# Altium PCB Left_Board.PcbDoc (part 1 of 2)
Units mm, origin at the board's own origin, x right, y up, seen from the top; angles counter-clockwise.
Board outline 34.7 x 82.01 mm, 6 copper layers (Top Layer, Layer 2, Layer 3, Layer 4, Layer 5, Bottom Layer), stack 1.538 mm thick; 59 components, 53 nets, 244 pads, 250 vias.
Unrouted connection lines stored in the file: 175.
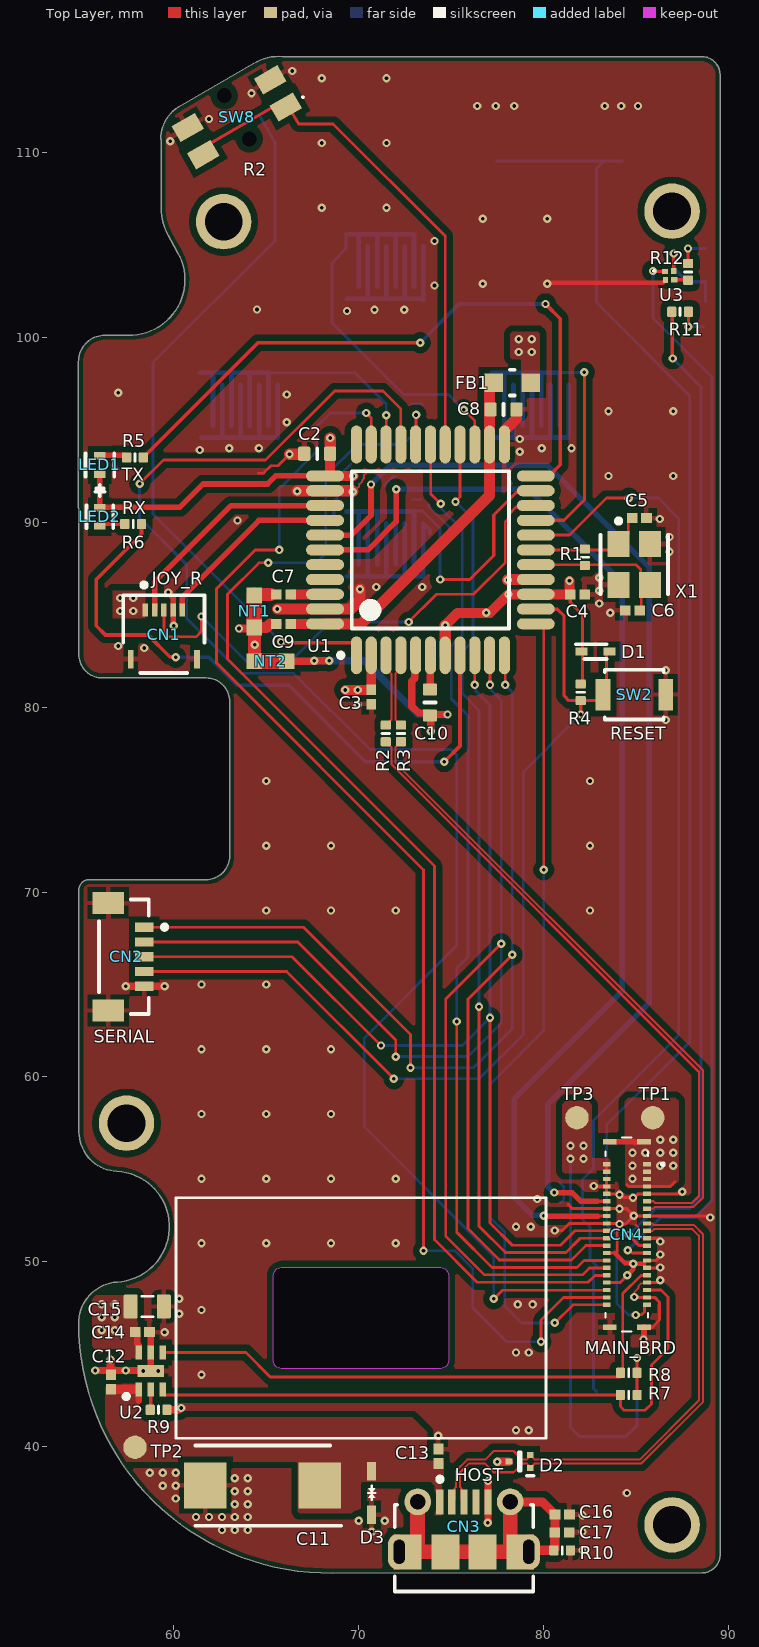
[diagram p0: Top Layer view]
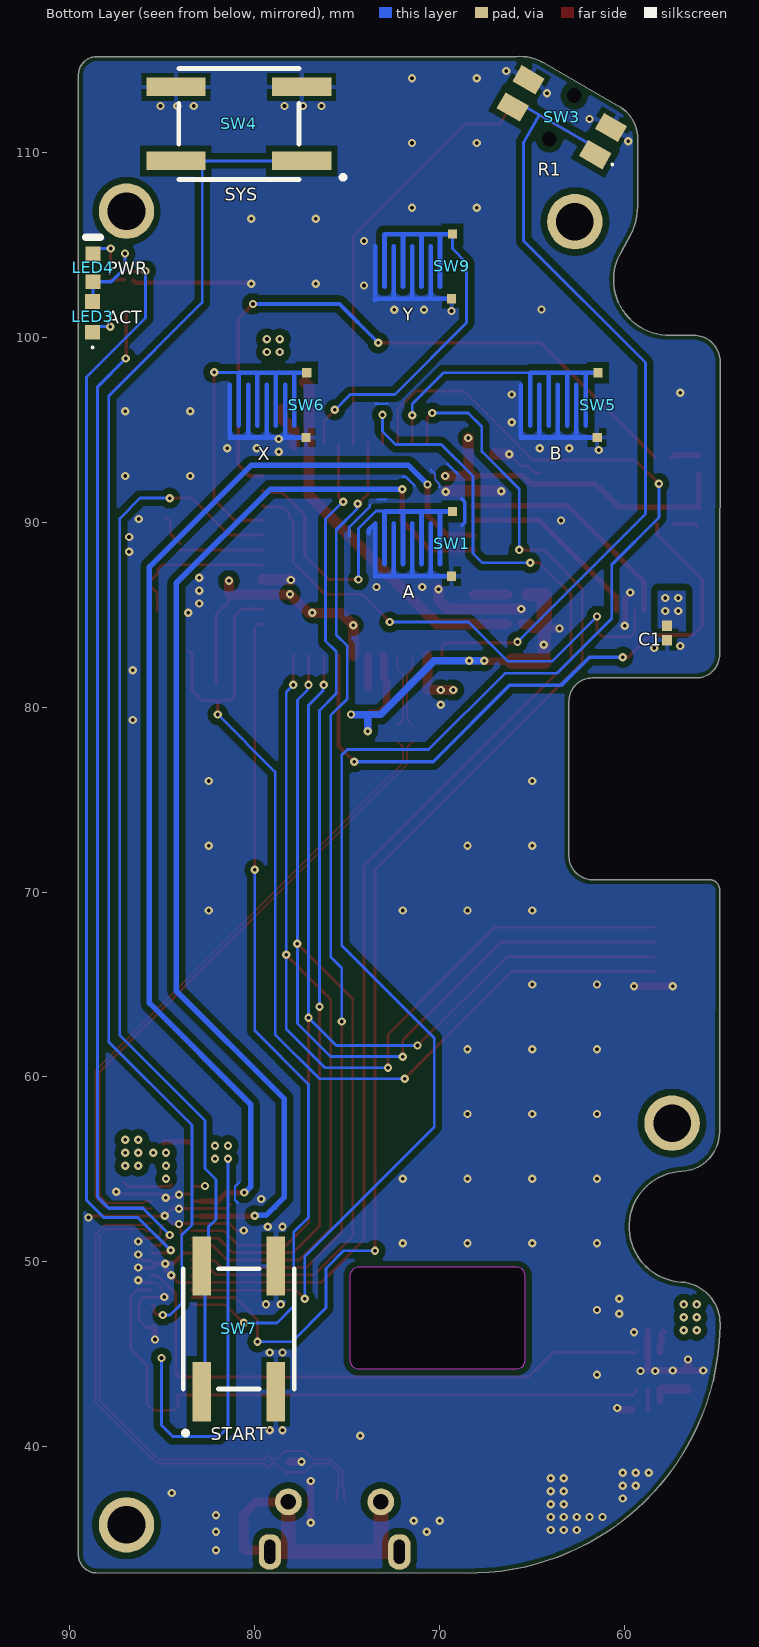
[diagram p1: Bottom Layer view, seen from below]
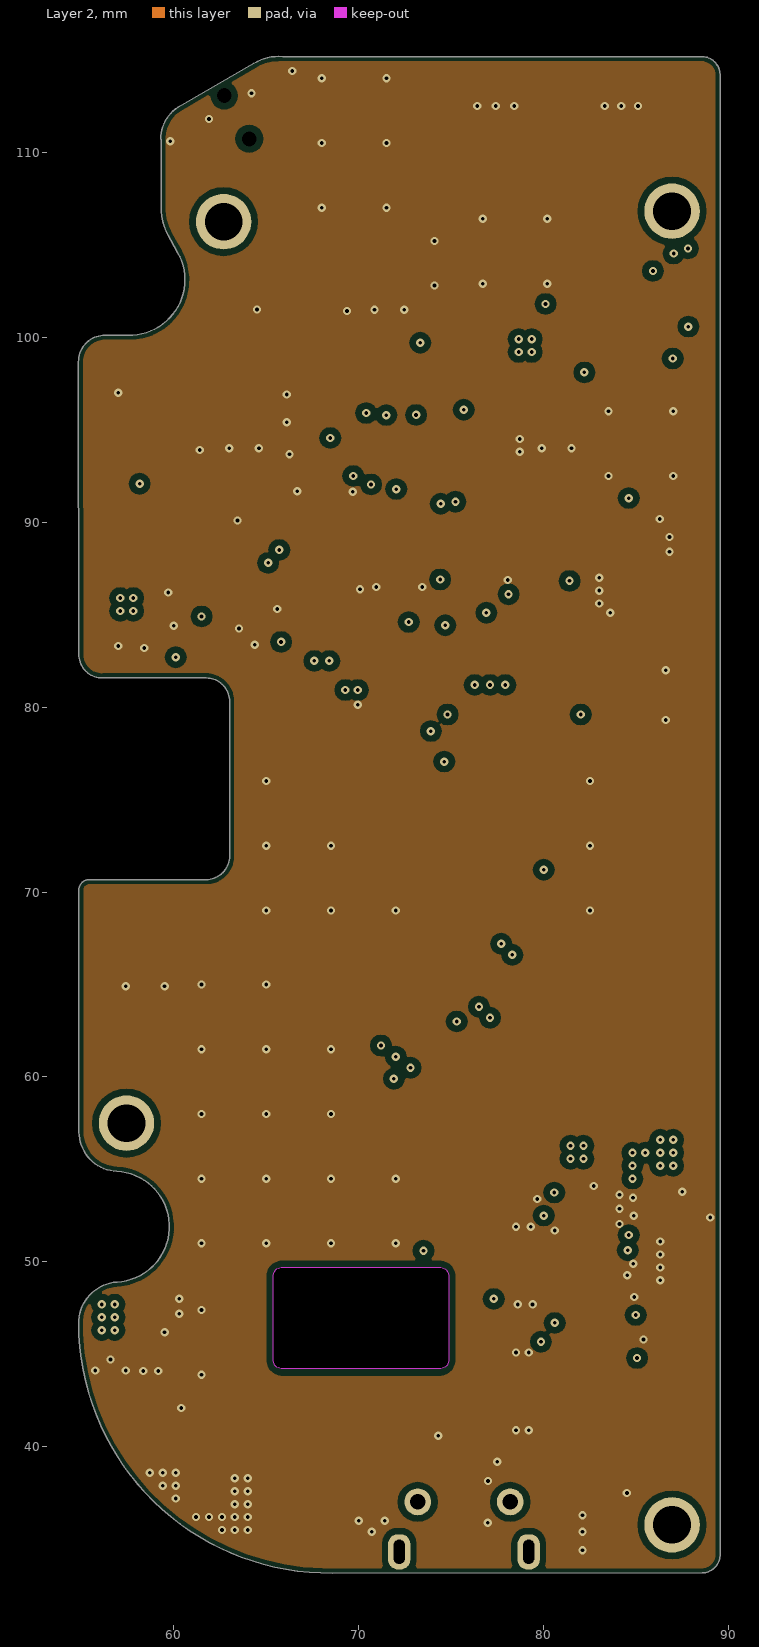
[diagram p2: Layer 2]
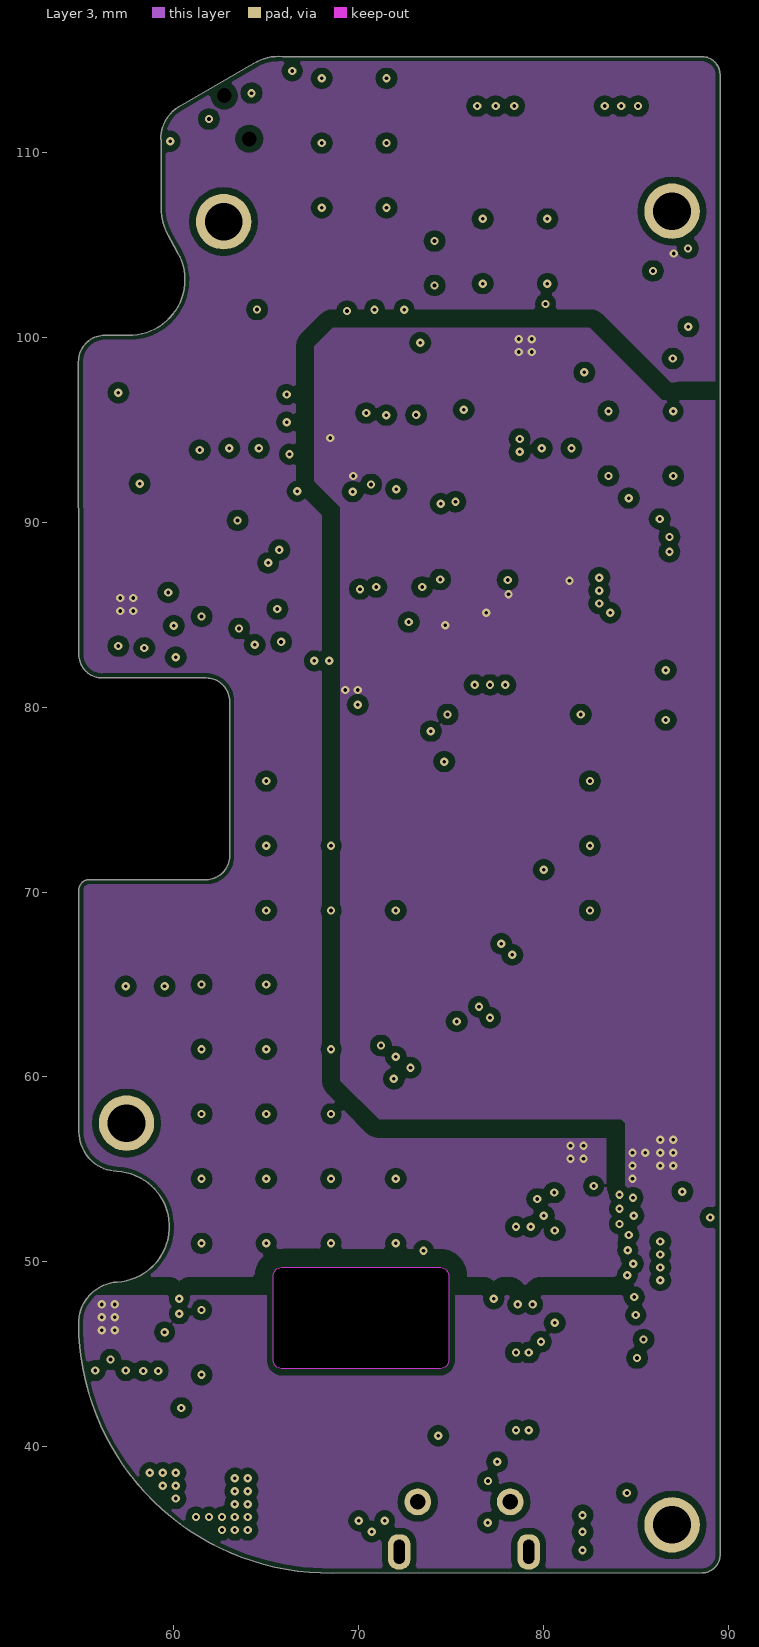
[diagram p3: Layer 3]
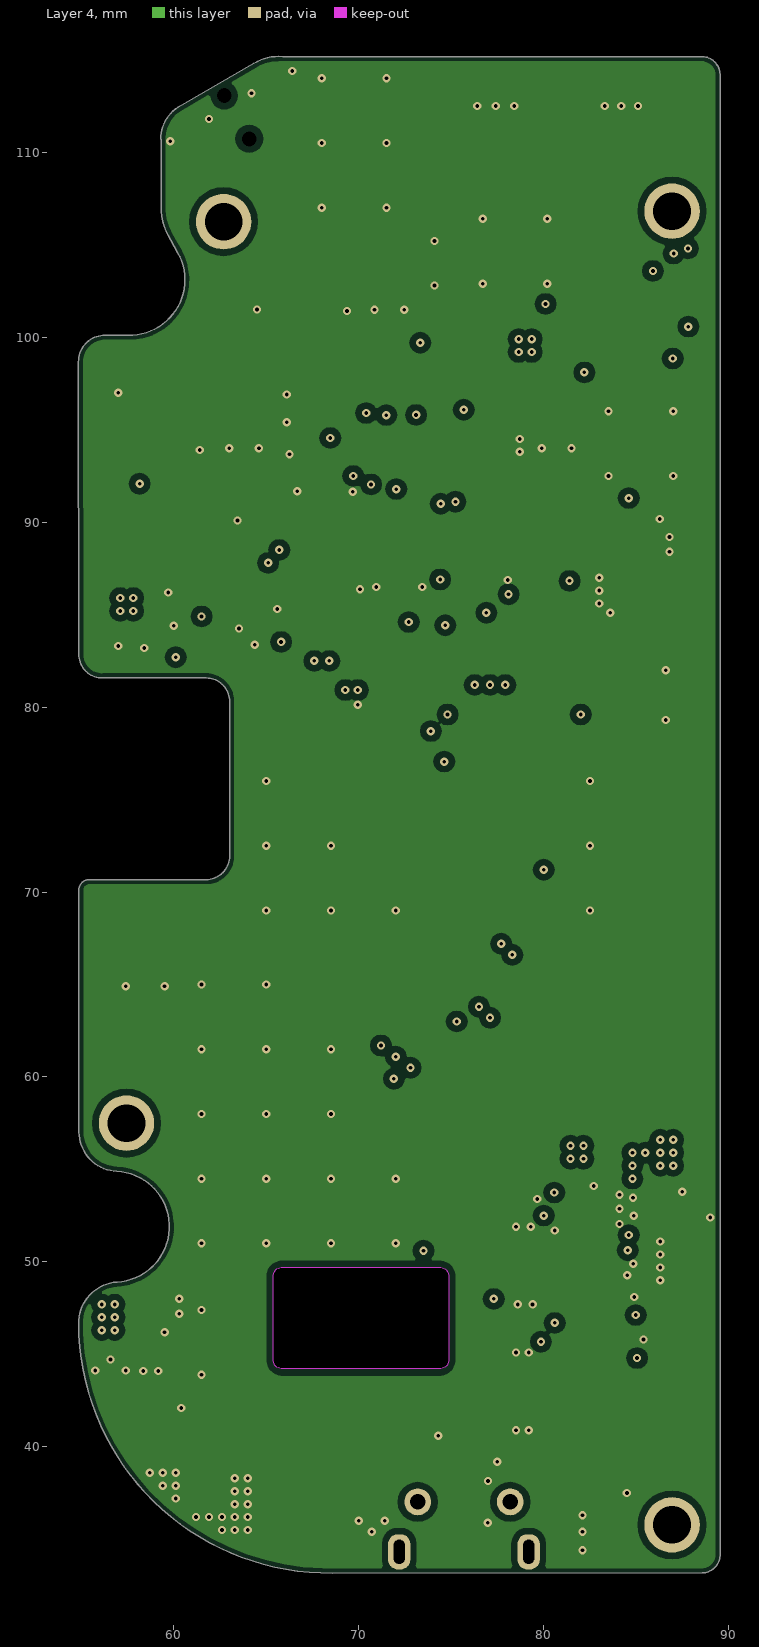
[diagram p4: Layer 4]
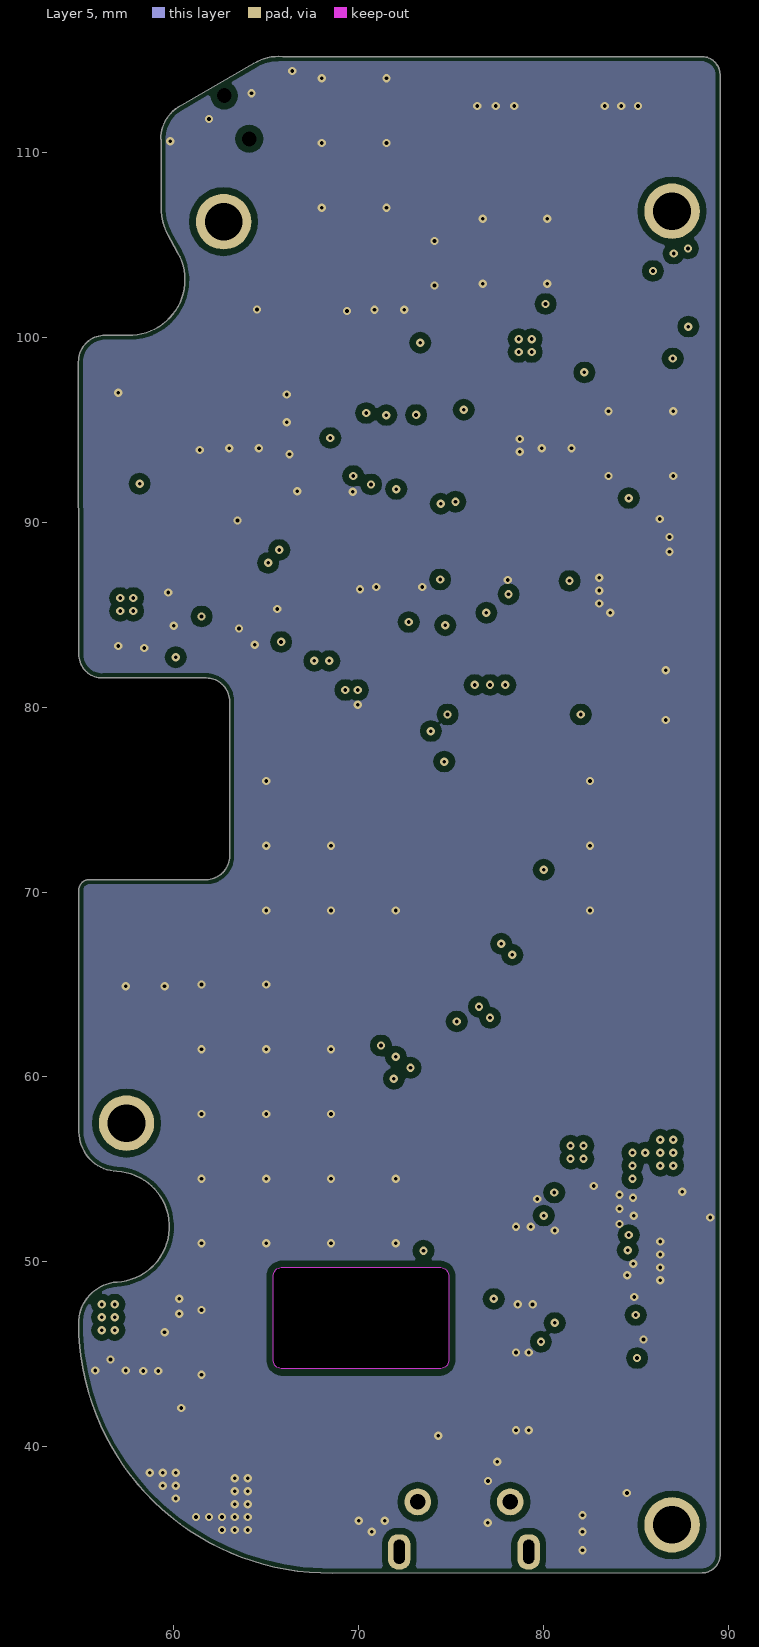
[diagram p5: Layer 5]
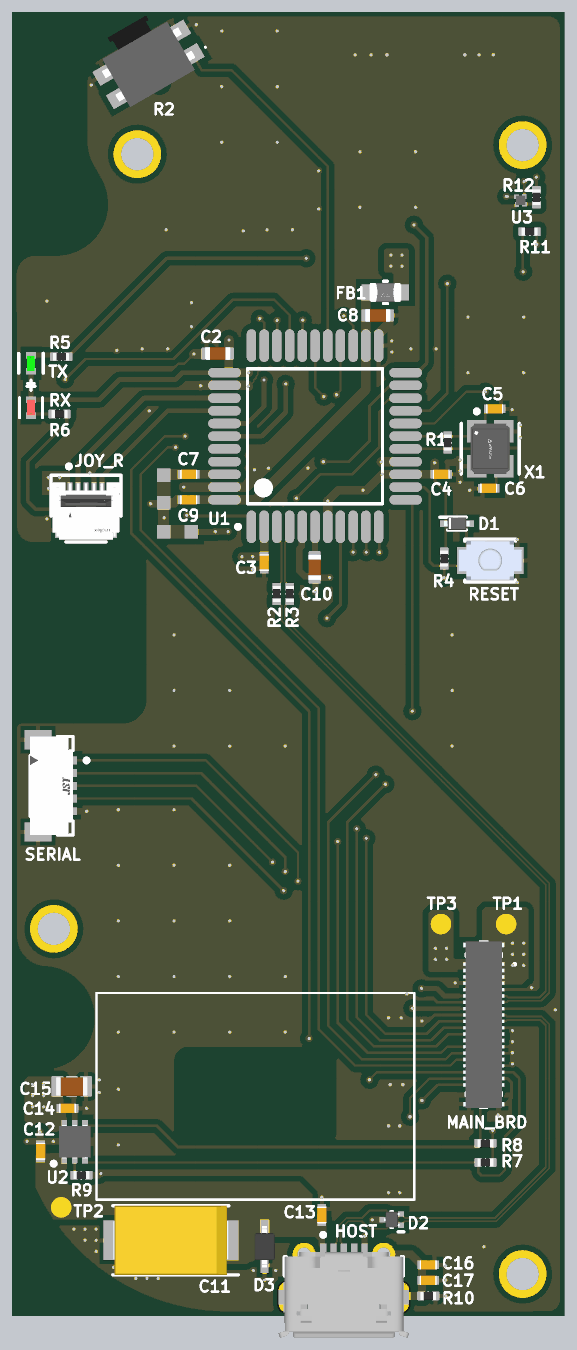
[diagram p7: 3D render of the assembled board from above, using the file's embedded part models]
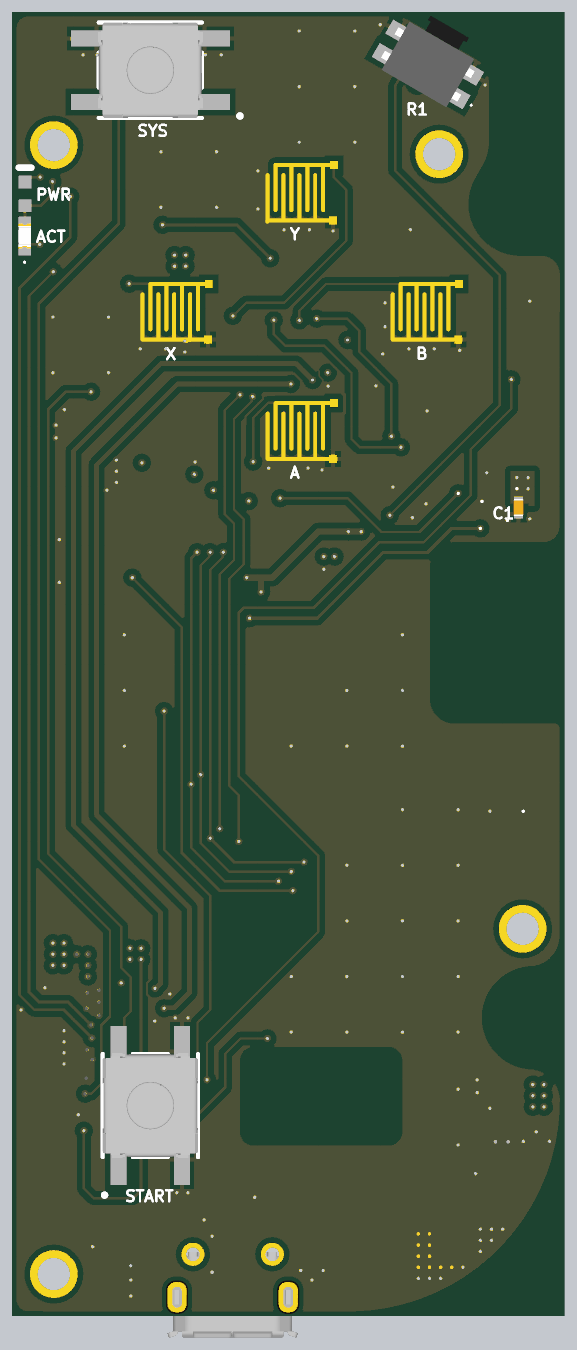
[diagram p8: 3D render of the assembled board from below, using the file's embedded part models]

## Layer stack, top to bottom
Top Solder: solder mask 0.0305, Solder Resist, Dk 3.8
Top Layer: signal copper 0.035
Dielectric 4: prepreg 0.0994, PP-015, Dk 4.1
Layer 2: signal copper 0.0152
Dielectric 2: core 0.55, Core-037, Dk 4.6
Layer 3: signal copper 0.0152
Dielectric 1: prepreg 0.1088, PP-016, Dk 4.1
Layer 4: signal copper 0.0152
Dielectric 3: core 0.55, Core-037, Dk 4.6
Layer 5: signal copper 0.0152
Dielectric 5: prepreg 0.0994, PP-015, Dk 4.1
Bottom Layer: signal copper 0.035
Bottom Solder: solder mask 0.0305, Solder Resist, Dk 3.8

## Board outline
56.918,54.899 cw(c57.004,57.03) 54.871,57.02 54.871,57.024 54.857,70.1 54.856,70.1 cw(c55.433,70.094) 55.439,70.671 61.746,70.671 ccw(c61.746,71.941) 63.016,71.941 63.016,80.306 ccw(c61.746,80.306) 61.746,81.576 56.134,81.576 cw(c56.134,82.846) 54.864,82.846 54.87,82.846 54.84,98.672 cw(c56.278,98.672) 56.278,100.11 57.514,100.11 57.514,100.111 ccw(c57.598,103.11) 60.221,104.566 59.838,105.255 59.836,105.254 cw(c62.628,107.053) 59.307,107.087 59.307,110.693 59.301,110.694 cw(c61.319,110.741) 60.25,112.453 64.321,114.804 cw(c65.655,112.666) 65.879,115.176 68.26,115.177 88.597,115.177 cw(c88.541,114.179) 89.54,114.216 89.54,34.121 cw(c88.542,34.177) 88.579,33.178 88.579,33.177 68.574,33.175 cw(c68.392,46.721) 54.845,46.652 cw(c57.081,46.677) 56.924,48.908 56.927,48.908 ccw(c56.761,51.903)
cut-out: 65.369,49.204 cw(c65.877,49.204) 65.877,49.712 74.361,49.712 cw(c74.361,49.204) 74.869,49.204 74.869,44.72 cw(c74.361,44.72) 74.361,44.212 65.877,44.212 cw(c65.877,44.72) 65.369,44.72

## Design rules (kind name [scope] priority, off if disabled: settings)
BoardOutlineClearance [All] p1: gap=0.254 ignorepadtopadclearanceinfootprint=FALSE except(0: Arc-OutlineEdge Arc-SplitContinuation Track-OutlineEdge Track-SplitContinuation SMDPad-OutlineEdge SMDPad-SplitContinuation THPad-SplitContinuation Via-OutlineEdge Via-SplitContinuation Fill-SplitContinuation Poly-SplitContinuation Region-OutlineEdge Region-SplitContinuation Text-OutlineEdge Text-SplitContinuation; 0.2: THPad-OutlineEdge)
Clearance [InNamedPolygon('+3V3_L03_P013')] p1: gap=0.2 ignorepadtopadclearanceinfootprint=FALSE except(0.09: Arc-Arc Arc-Track Track-Track; 0.127: SMDPad-SMDPad; 0.35: Arc-Fill Arc-Poly Arc-Region Track-Fill Track-Poly Track-Region SMDPad-Fill SMDPad-Poly SMDPad-Region THPad-Fill THPad-Poly THPad-Region Via-Fill Via-Poly Via-Region Fill-Hole Poly-Hole Region-Hole; 1: Fill-Fill Fill-Poly Fill-Region Poly-Poly Poly-Region Region-Region)
Clearance Clearance_1 [All] p2: gap=0.2 ignorepadtopadclearanceinfootprint=FALSE except(0.02: Fill-Hole; 0.09: Arc-Arc Arc-Track Track-Track; 0.127: SMDPad-SMDPad; 0.35: Arc-Fill Arc-Poly Arc-Region Track-Fill Track-Poly Track-Region SMDPad-Fill SMDPad-Poly SMDPad-Region THPad-Fill THPad-Poly THPad-Region Via-Fill Via-Poly Via-Region Fill-Fill Fill-Poly Fill-Region Poly-Poly Poly-Region Poly-Hole Region-Region)
ComponentClearance [All] p1: gap=0.15 collisioncheckmode=3 verticalgap=0.254 showdistances=FALSE
DiffPairsRouting PCIE [InDifferentialPairClass('PCIe Gen 3x1')] p1: maxlimit=0.254 minlimit=0.102 mostfreqgap=0.254 toplayer_maxgap=0.102 toplayer_prefgap=0.102 toplayer_minwidth=0.203 toplayer_maxwidth=0.203 toplayer_prefwidth=0.203 midlayer1_mingap=0.254 midlayer1_minwidth=0.381 midlayer1_maxwidth=0.381 midlayer1_prefwidth=0.381 midlayer2_mingap=0.254 midlayer2_minwidth=0.381 midlayer2_maxwidth=0.381 midlayer2_prefwidth=0.381 midlayer3_mingap=0.254 midlayer3_minwidth=0.381 midlayer3_maxwidth=0.381 midlayer3_prefwidth=0.381 midlayer4_mingap=0.254 midlayer4_minwidth=0.381 midlayer4_maxwidth=0.381 midlayer4_prefwidth=0.381 bottomlayer_maxgap=0.102 bottomlayer_prefgap=0.102 bottomlayer_minwidth=0.203 bottomlayer_maxwidth=0.203 bottomlayer_prefwidth=0.203 maxuncoupledlength=12.7
DiffPairsRouting USB_1 [InDifferentialPairClass('USB 2.0')] p2: maxlimit=0.254 minlimit=0.102 mostfreqgap=0.254 toplayer_maxgap=0.102 toplayer_prefgap=0.102 toplayer_minwidth=0.112 toplayer_maxwidth=0.112 toplayer_prefwidth=0.112 midlayer1_mingap=0.254 midlayer1_minwidth=0.381 midlayer1_maxwidth=0.381 midlayer1_prefwidth=0.381 midlayer2_maxgap=0.102 midlayer2_prefgap=0.102 midlayer2_minwidth=0.105 midlayer2_maxwidth=0.105 midlayer2_prefwidth=0.105 midlayer3_mingap=0.254 midlayer3_minwidth=0.381 midlayer3_maxwidth=0.381 midlayer3_prefwidth=0.381 midlayer4_mingap=0.254 midlayer4_minwidth=0.381 midlayer4_maxwidth=0.381 midlayer4_prefwidth=0.381 bottomlayer_maxgap=0.102 bottomlayer_prefgap=0.102 bottomlayer_minwidth=0.112 bottomlayer_maxwidth=0.112 bottomlayer_prefwidth=0.112 maxuncoupledlength=12.7
HoleToHoleClearance [All] p1: gap=0.3 allowstackedmicrovias=TRUE
MatchedLengths PCIE_1 [InDifferentialPairClass('PCIe Gen 3x1')] p1: tolerance=0.127 checknetsindiffpair=TRUE checkdiffpairvsdiffpair=FALSE checkxsignals=FALSE checkothers=FALSE
MatchedLengths HDMI [InDifferentialPairClass('HDMI')] p2: tolerance=1.27 checknetsindiffpair=TRUE checkdiffpairvsdiffpair=FALSE checkxsignals=FALSE checkothers=FALSE
MatchedLengths "USB 2.0" [InDifferentialPairClass('USB 2.0')] p3: tolerance=1.27 checknetsindiffpair=TRUE checkdiffpairvsdiffpair=FALSE checkxsignals=FALSE checkothers=FALSE
MinimumSolderMaskSliver [All] p1: minsoldermaskwidth=0.1
PlaneClearance [All] p1: clearance=0.4
PolygonConnect GND [InNet('GND')] p1: thpad.connectstyle=Relief thpad.reliefconductorwidth=0.254 thpad.reliefentries=4 thpad.polygonreliefangle="90 Angle" thpad.airgapwidth=0.254 smdpad.connectstyle=Relief smdpad.reliefconductorwidth=0.254 smdpad.reliefentries=4 smdpad.polygonreliefangle="90 Angle" smdpad.airgapwidth=0.254 via.connectstyle=Direct via.reliefconductorwidth=0.254 via.reliefentries=4 via.polygonreliefangle="90 Angle" via.airgapwidth=0.254
PolygonConnect Other [All] p2: connectstyle=Direct reliefconductorwidth=0.254 reliefentries=4 polygonreliefangle="90 Angle" airgapwidth=0.254
RoutingCorners [All] p1: cornerstyle=Round minsetback=2.54 maxsetback=2.54
RoutingVias [All] p1: holewidth=0.2 width=0.45 viastyle="Through Hole" minholewidth=0.2 minwidth=0.45 maxholewidth=0.305 maxwidth=0.61
SilkToSilkClearance [All] p1: silktosilkclearance=0.05
SilkToSolderMaskClearance [IsPad] p1: minsilkscreentomaskgap=0.08 clearancetoexposedcopper=TRUE
SolderMaskExpansion [All] p1: expansion=0.01 istentingtop=FALSE
UnRoutedNet [All] p1: checkbadconnections=TRUE
Width [All] p1: maxlimit=4 minlimit=0.09 preferedwidth=0.175 toplayer_prefwidth=0.15 bottomlayer_prefwidth=0.15 minimp=50.000000 maximp=50.000000 favimp=50.000000
21 further rules are at their usual default settings.

## Classes and differential pairs
differential pair class "USB 2.0": E1 GD GD0
differential pair GD: +GD_P -GD_N
differential pair GD0: +GD0_P -GD0_N
differential pair E1: +E1_P -E1_N

## Components (designator, comment, footprint, x,y, rotation, side; value= is the part's Value field where it differs from the comment)
C1 "0.1uF" CAPC1005X56X25LL10T15 57.7,84.01 r270 bottom
C2 "1uF" CAPC0603(1608)100_L 67.75,93.7 r180 top
C3 "0.1uF" CAPC1005X56X25LL10T15 70.675,80.55 r270 top
C4 "0.1uF" CAPC1005X56X25LL10T15 81.825,86.1 r0 top
C5 "10pF" CAPC1005X56X25LL10T15 85.175,90.222 r0 top
C6 "10pF" CAPC1005X56X25LL10T15 84.8,85.222 r180 top
C7 "0.1uF" CAPC1005X56X25LL10T15 65.925,86.1 r180 top
C8 "1uF" CAPC0603(1608)100_L 77.825,96.1 r0 top
C9 "0.1uF" CAPC1005X56X25LL10T15 65.925,84.5 r180 top
C10 "1uF" CAPC0603(1608)100_L 73.85,80.25 r270 top
C11 "150uF" CAPPM7344X310N 64.8,37.9 r180 top
C12 "0.1uF" CAPC1005X56X25LL10T15 56.6,43.5 r90 top
C13 "0.1uF" CAPC1005X56X25LL10T15 74.3,39.49 r90 top
C14 "0.1uF" CAPC1005X56X25LL10T15 58.3,46.2 r0 top
C15 "10uF" CAPC0805(2012)145_L 58.568,47.587 r0 top value=10µF
C16 "0.1uF" CAPC1005X56X25LL10T15 81,36.35 r0 top
C17 "0.001uF" CAPC1005X56X25LL10T15 80.99,35.375 r0 top value=0.1uF
CN1 "JOY_R" FP-503480-0540-MFG 59.462,83.949 r0 top locked
CN2 "SERIAL" FP-SM05B-SURS-TF_LF_SN-MFG 57.3,66.5 r270 top locked
CN3 "HOST" 105017-0001 75.688,35.671 r0 top
CN4 "MAIN_BRD" BM20B0840DS04V51 84.494,51.478 r90 top locked
D1 "1SS400T1G" SODFL1608X70N 82.8,83 r0 top
D2 "TPD2E009DRTR" SOTFL35P100X50-3N 78.7,39.2 r180 top
D3 "GBLC08C-N" SOD-323_L1.8-W1.3-LS2.5-BI 70.7,37.5 r270 top
FB1 "30Ω" FP-MH2029-MFG 78.3,97.55 r0 top
LED1 "TX" FP-SM0402GC-MFG 56,93.095 r90 top
LED2 "RX" FP-SM0402RC-MFG 56,90.295 r270 top
LED3 "ACT" LED_0603 88.775,101.1 r180 bottom
LED4 "PWR" EVRL-0603-2_V 88.75,103.75 r90 bottom
NT1 "NET_TIE" NET_TIE1 64.35,85.175 r270 top net-tie
NT2 "NET_TIE" NET_TIE1 65.225,82.475 r0 top net-tie
R1 "1M" RESC0402(1005)_L 82.225,88.1 r270 top
R2 "22R" RESC0402(1005)_L 71.462,78.575 r90 top
R3 "22R" RESC0402(1005)_L 72.287,78.575 r90 top
R4 "10k" RESC0402(1005)_L 82,80.8 r270 top
R5 "1k" RESC0402(1005)_L 57.9,93.5 r180 top
R6 "1k" RESC0402(1005)_L 57.8,89.9 r180 top
R7 "10k" RESC0402(1005)_L 84.6,42.8 r0 top
R8 "100k" RESC0402(1005)_L 84.6,44 r180 top
R9 "49.9k" RESC0402(1005)_L 59.175,42 r0 top
R10 "1M" RESC0402(1005)_L 81,34.4 r0 top
R11 "1k" RESC0402(1005)_L 87.375,101.375 r0 top
R12 "1k" RESC0402(1005)_L 87.81,103.535 r90 top
SW1 "A" L4.0-W4.0-CNDV-PAD#1 71.74,88.828 r180 bottom locked
SW2 "RESET" FP-B3U-1000P-MFG 84.9,80.675 r180 top locked
SW3 "R1" APTCLGTVTR 63.401,111.896 r30 bottom
SW4 "SYS" EVQQ2 80.867,111.535 r0 bottom locked
SW5 "B" L4.0-W4.0-CNDV-PAD#1 63.865,96.328 r180 bottom locked
SW6 "X" L4.0-W4.0-CNDV-PAD#2 79.615,96.328 r180 bottom locked
SW7 "START" EVQQ2 80.867,46.378 r90 bottom locked
SW8 "R2" APTCLGTVTR_No_Holes 63.402,111.897 r210 top
SW9 "Y" L4.0-W4.0-CNDV-PAD#3 71.74,103.828 r180 bottom locked
TP1 "5V" TP 85.9,57.8 r0 top
TP2 "VBUS" TP 57.9,39.975 r0 top
TP3 "3V3" TP 81.8,57.8 r0 top
U1 "ATmega32U4-AU" 44ML_M 73.875,88.5 r90 top locked
U2 "AP22652FDZ-7" SON65P200X200X80-7N-D 58.75,44.1 r90 top locked
U3 "74LVC1G07GX4Z" 74LVC1G07GX4Z 86.81,103.335 r0 top
X1 "16MHz" FP-ABM8G-MFG 84.9,87.711 r270 top locked

## Footprints (in the part's own frame and the unit in brackets; to place one, negate y for a bottom-side part, rotate by r counter-clockwise, add the part's x,y. Pads: shape width x height; smd on the part's side, far side on the other; paste and mask are expansions set on the pad)
44ML_M [mm] "Thin QFP, 44-Leads, Body 10x10mm, Pitch 0.8mm, IPC Low Density"
  oval 2.05x0.6 smd: 1(-5.7,4) 2(-5.7,3.2) 3(-5.7,2.4) 4(-5.7,1.6) 5(-5.7,0.8) 6(-5.7,0) 7(-5.7,-0.8) 8(-5.7,-1.6) 9(-5.7,-2.4) 10(-5.7,-3.2) 11(-5.7,-4) 23(5.7,-4) 24(5.7,-3.2) 25(5.7,-2.4) 26(5.7,-1.6) 27(5.7,-0.8) 28(5.7,0) 29(5.7,0.8) 30(5.7,1.6) 31(5.7,2.4) 32(5.7,3.2) 33(5.7,4)
  oval 0.6x2.05 smd: 12(-4,-5.7) 13(-3.2,-5.7) 14(-2.4,-5.7) 15(-1.6,-5.7) 16(-0.8,-5.7) 17(0,-5.7) 18(0.8,-5.7) 19(1.6,-5.7) 20(2.4,-5.7) 21(3.2,-5.7) 22(4,-5.7) 34(4,5.7) 35(3.2,5.7) 36(2.4,5.7) 37(1.6,5.7) 38(0.8,5.7) 39(0,5.7) 40(-0.8,5.7) 41(-1.6,5.7) 42(-2.4,5.7) 43(-3.2,5.7) 44(-4,5.7)
  silkscreen extent -5.82,-4.25 4.25,4.97, body extent -5,-5 5,5, height 1.2
74LVC1G07GX4Z [mm]
  rect 0.33x0.28 smd: 1(-0.25,0.225) 3(0.25,-0.225)
  rect 0.28x0.33 smd: 2(-0.225,-0.25) 4(0.225,0.25)
  silkscreen extent -0.9,0.2 -0.8,0.3, body extent -0.3,-0.3 0.3,0.3, height 0.45
105017-0001 [mm]
  rect 0.4x1.35 smd: 1(-1.3,1.35) 2(-0.65,1.35) 3(0,1.35) 4(0.65,1.35) 5(1.3,1.35)
  round 1.45 hole 0.85: 6(-2.5,1.35)
  round 1.45 hole 0.85 paste+0: 7(2.5,1.35)
  rrect84% 1.2x1.9 hole 0.6 slot 1.3 at 90 deg mask+0.102: 8(-3.5,-1.35) 11(3.5,-1.35)
  rect 1.5x1.9 smd: 8(-3.05,-1.35) 9(-1,-1.35) 10(1,-1.35) 11(3.05,-1.35)
  Top Layer circle w0.5: c3.6,-0.9 r0.25
  Top Layer circle w0.5: c-3.6,-0.9 r0.25
  Top Layer circle w0.5: c-3.6,-1.8 r0.25
  Top Layer region: 3.6,-0.9 3.6,-1.8 4.1,-1.8 4.1,-0.9
  Top Layer region: -3.6,-1.8 -3.6,-0.9 -4.1,-0.9 -4.1,-1.8
  Top Layer lines w0.5: 3.546,-1.556 ccw(c3.6,-1.8) 3.85,-1.8 ccw(c3.6,-1.8) 3.546,-1.556
  silkscreen extent -3.75,-3.5 3.75,2.7, body extent -4.1,-3.9 4.1,1.5, height 2.67
APTCLGTVTR [mm]
  rect 1.45x1 smd: 1(-2.575,0.85) 2(-2.575,-0.85) 3(2.575,0.85) 4(2.575,-0.85)
  round 0.4 hole 0.8 unplated: MH1(0,1.35) MH2(0,-1.35)
  silkscreen extent -3.69,0.8 -3.59,0.9, body extent -2.77,-2.75 2.77,1.75, height 1.67
APTCLGTVTR_No_Holes [mm]
  rect 1.45x1 smd: 1(-2.574,0.85) 2(-2.574,-0.85) 3(2.576,0.85) 4(2.576,-0.85)
  silkscreen extent -3.69,0.8 -3.59,0.9, body extent -2.77,-2.75 2.77,1.75, height 1.67
BM20B0840DS04V51 [mm]
  rect 0.23x0.42 smd: 1(3.8,-1.09) 2(3.8,1.09) 3(3.4,-1.09) 4(3.4,1.09) 5(3,-1.09) 6(3,1.09) 7(2.6,-1.09) 8(2.6,1.09) 9(2.2,-1.09) 10(2.2,1.09) 11(1.8,-1.09) 12(1.8,1.09) 13(1.4,-1.09) 14(1.4,1.09) 15(1,-1.09) 16(1,1.09) 17(0.6,-1.09) 18(0.6,1.09) 19(0.2,-1.09) 20(0.2,1.09) 21(-0.2,-1.09) 22(-0.2,1.09) 23(-0.6,-1.09) 24(-0.6,1.09) 25(-1,-1.09) 26(-1,1.09) 27(-1.4,-1.09) 28(-1.4,1.09) 29(-1.8,-1.09) 30(-1.8,1.09) 31(-2.2,-1.09) 32(-2.2,1.09) 33(-2.6,-1.09) 34(-2.6,1.09) 35(-3,-1.09) 36(-3,1.09) 37(-3.4,-1.09) 38(-3.4,1.09) 39(-3.8,-1.09) 40(-3.8,1.09)
  rect 0.3x0.75 smd: MP1(5.01,-0.925) MP2(5.01,0.925) MP3(-5.01,-0.925) MP4(-5.01,0.925)
  silkscreen extent -5.25,-2 5.25,1.15, body extent -5.24,-1.28 5.24,1.28, height 1
CAPC0603(1608)100_L [mm] "Chip Capacitor, Body 1.6x0.8mm, Height 1.0mm, IPC High Density"
  rrect25% 0.66x0.76 smd: 1(-0.7,0) 2(0.7,0)
  silkscreen extent 0,-0.3 0,0.3, body extent -0.8,-0.4 0.8,0.4, height 0.95
CAPC0805(2012)145_L [mm] "Chip Capacitor, Body 2.0x1.2mm, Height 1.45mm, IPC High Density"
  rrect25% 0.76x1.3 smd: 1(-0.9,0) 2(0.89,0)
  silkscreen extent -0.3,-0.55 0.3,0.55, body extent -1,-0.6 1,0.6, height 1.45
CAPC1005X56X25LL10T15 [mm] "Chip Capacitor, 2-Leads, Body 1.10x0.60mm, IPC High Density"
  rect 0.58x0.54 smd: 1(-0.39,0) 2(0.39,0)
  body extent -0.55,-0.3 0.55,0.3, height 0.56
CAPPM7344X310N [mm]
  rect 2.3x2.5 smd: 1(-3.1,0) 2(3.1,0)
  silkscreen extent -4.25,-2.18 3.65,2.18, body extent -3.65,-2.17 3.65,2.17, height 3.1
EVQQ2 [mm]
  rect 3.2x1 smd: 1(-3.4,2) 2(-3.4,-2) 3(3.4,-2) 4(3.4,2)
  silkscreen extent -5.75,-3 3.25,3, body extent -3.3,-3 3.3,3, height 3.1
EVRL-0603-2_V [mm] "SMD, 2-Leads, Body 1.6x0.8mm"
  rect 0.8x0.8 smd: 1(-0.75,0) 2(0.75,0)
  silkscreen extent 1.65,-0.4 1.65,0.4, body extent -0.8,-0.4 0.8,0.4, height 0.5
FP-503480-0540-MFG [mm]
  rect 0.3x0.7 smd paste+0: 1(-1,1.3) 2(-0.5,1.3) 3(0,1.3) 4(0.5,1.3) 5(1,1.3)
  rect 0.3x1 smd paste+0: 6(-1.79,-1.35) 7(1.79,-1.35)
  silkscreen extent -2.2,-2.1 2.2,2.77, body extent -2.3,-2.2 2.3,2.2, height 0.25
FP-ABM8G-MFG [mm]
  rect 1.4x1.2 smd paste+0: 1(-1.1,-0.85) 2(1.1,-0.85) 3(1.1,0.85) 4(-1.1,0.85)
  silkscreen extent -2.47,-1.83 1.6,1.83, body extent -1.9,-1.55 1.9,1.55, height 0.25
FP-B3U-1000P-MFG [mm]
  rect 0.8x1.7 smd paste+0: 1(-1.7,0) 2(1.7,0)
  silkscreen extent -1.6,-1.35 1.6,1.35, body extent -2,-1.26 2,1.24, height 1.6
FP-MH2029-MFG [mm]
  rect 1x1 smd paste+0: 1(-1,0) 2(1,0)
  silkscreen extent -0.13,-0.7 0.13,0.7, body extent -1.6,-0.8 1.6,0.8, height 0.25
FP-SM05B-SURS-TF_LF_SN-MFG [mm]
  rect 0.5x1 smd paste+0: 1(-1.6,1.1) 2(-0.8,1.1) 3(0,1.1) 4(0.8,1.1) 5(1.6,1.1)
  rect 1.2x1.7 smd paste+0: 6(-2.9,-0.85) 7(2.9,-0.85)
  silkscreen extent -3.1,-1.35 3.1,2.33, body extent -3.6,-1.8 3.6,1.7, height 0.25
FP-SM0402GC-MFG [mil]
  rect 16x24 smd paste+0: 1(-19.5,0) 2(19.5,0)
  silkscreen extent -58,-30 24,31, body extent -31,-18 31,18, height 10
FP-SM0402RC-MFG [mil]
  rect 16x24 smd paste+0: 1(-19.5,0) 2(19.5,0)
  silkscreen extent -63,-29 25,29, body extent -31,-18 31,18, height 10
L4.0-W4.0-CNDV-PAD#1 [mm] "Conductive Pad Switch"
  rect 0.5x0.5 smd paste-2539.97: 1(2.425,1.75) 2(2.375,-1.75)
  Top Layer lines w0.25: 2.425,1.75 1.75,1.75 ; 2.375,-1.75 2.125,-1.75 -1.75,-1.75 -1.75,1.1 ; 1.75,-1.1 1.75,1.75 ; 1.25,-1.75 1.25,1.1 ; 0.75,-1.107 0.75,1.75 ; 0.25,-1.75 0.25,1.1 ; -0.25,-1.107 -0.25,1.75 ; -0.75,-1.75 -0.75,1.1 ; -1.25,-1.1 -1.25,1.75 -0.25,1.75 ; 1.75,1.75 0.75,1.75 ; 0.75,1.75 -0.25,1.75
L4.0-W4.0-CNDV-PAD#2 [mm] "Conductive Pad Switch"
  rect 0.5x0.5 smd paste-2539.97: 1(2.425,1.75) 2(2.375,-1.75)
  Top Layer lines w0.25: 2.425,1.75 1.75,1.75 ; 2.375,-1.75 2.125,-1.75 1.25,-1.75 ; 1.75,-1.1 1.75,1.75 ; 1.25,1.1 1.25,-1.75 ; 1.04,-1.828 1.015,-1.803 1.015,-1.75 ; 1.015,-1.828 1.053,-1.789 1.211,-1.789 1.25,-1.75 ; 0.75,-1.107 0.75,1.75 ; 0.25,1.1 0.25,-1.75 ; -0.25,-1.107 -0.25,1.75 ; -0.75,1.1 -0.75,-1.75 ; -1.25,-1.1 -1.25,1.75 -0.25,1.75 ; -1.75,1.1 -1.75,-1.75 -0.75,-1.75 ; 1.75,1.75 0.75,1.75 ; 1.25,-1.75 1.015,-1.75 ; 1.015,-1.75 0.25,-1.75 ; 0.75,1.75 -0.25,1.75 ; 0.25,-1.75 -0.75,-1.75
L4.0-W4.0-CNDV-PAD#3 [mm] "Conductive Pad Switch"
  rect 0.5x0.5 smd paste-2539.97: 1(2.425,1.75) 2(2.375,-1.75)
  Top Layer lines w0.25: 2.425,1.75 1.75,1.75 ; 2.375,-1.75 2.125,-1.75 -1.75,-1.75 ; 1.75,-1.1 1.75,1.75 ; 1.25,-1.75 1.25,1.1 ; 0.75,-1.107 0.75,1.75 ; 0.25,-1.75 0.25,1.1 ; -0.25,-1.107 -0.25,1.75 ; -0.75,-1.75 -0.75,1.1 ; -1.25,-1.1 -1.25,1.75 -0.25,1.75 ; -1.75,1.1 -1.75,-1.75 ; -1.76,-1.828 -1.76,-1.76 -1.75,-1.75 ; 1.75,1.75 0.75,1.75 ; 0.75,1.75 -0.25,1.75
LED_0603 [mm]
  rect 0.8x0.8 smd: 1(0,0.825) 2(0,-0.825)
  silkscreen extent -0.05,-1.7 0.05,-1.6, body extent -0.4,-0.8 0.4,0.8, height 0.55
NET_TIE1 [mm]
  rect 0.85x0.85 smd: 1(-0.875,0) 2(0.875,0)
  Top Layer lines w0.85: 0.875,0 -0.875,0
RESC0402(1005)_L [mm] "Chip Resistor, Body 1.0x0.5mm, IPC High Density"
  rrect25% 0.5x0.55 smd: 1(-0.45,0) 2(0.45,0)
  silkscreen extent 0,-0.2 0,0.2, body extent -0.5,-0.25 0.5,0.25, height 0.3
SOD-323_L1.8-W1.3-LS2.5-BI [mm]
  rect 0.985x0.49 smd mask+0.051: 1(-1.175,0) 2(1.175,0)
  silkscreen extent -0.38,-0.2 0.36,0.2, body extent -1.3,-0.65 1.3,0.65, height 1
SODFL1608X70N [mm]
  rect 0.64x0.42 smd: 1(-0.75,0) 2(0.75,0)
  silkscreen extent -1.07,-0.4 0.6,0.4, body extent -0.8,-0.4 0.8,0.4, height 0.7
SON65P200X200X80-7N-D [mm]
  rect 0.75x0.35 smd: 1(-1,0.65) 2(-1,0) 3(-1,-0.65) 4(1,-0.65) 5(1,0) 6(1,0.65)
  rect 0.65x1.45 smd: 7(0,0)
  silkscreen extent -1.5,1.2 -1.25,1.45, body extent -1.05,-1 1.05,1, height 0.8
SOTFL35P100X50-3N [mm]
  rect 0.36x0.33 smd: 1(-0.58,0.35) 2(-0.58,-0.35) 3(0.58,0)
  silkscreen extent -0.76,-0.5 0.05,0.76, body extent -0.5,-0.5 0.5,0.5, height 0.5
TP [mm]
  round 1.27 smd paste-2539.97: 1(0,0)

## Part data
C1 C3 C4 C7 C9 C12 C13 C14 C16 C17: library part CMP-001-00001-6, "Chip Capacitor, 0.1 uF, +/- 5%, 16 V, 0402 (1005 Metric)", Capacitor Type=Ceramic, Case/Package=0402, Max Operating Temperature=125°C, Min Operating Temperature=-55°C, Tolerance=5%, Voltage Rating=16V, Mounting Technology=SM, Pins=2, RoHS Compliant=True
C2 C8 C10: library part CMP-001-00076-4, "Chip Capacitor, 1uF +/-20%, 10V, 0603, Thickness 1 mm", Case/Package=0603, Max Operating Temperature=85°C, Min Operating Temperature=-55°C, Tolerance=10%, Voltage Rating=10V, Mounting Technology=SMT, Pins=2
C5 C6: library part CMP-001-00001-6, "Chip Capacitor, 10 pF, +/- 5%, 16 V, 0402 (1005 Metric)", Capacitor Type=Ceramic, Case/Package=0402, Max Operating Temperature=125°C, Min Operating Temperature=-55°C, Tolerance=5%, Voltage Rating=16V, Mounting Technology=SM, Pins=2, RoHS Compliant=True
C11: library part TPSD157K016S0125, "Capacitor Polarised", Manufacturer_Name=AVX, Mouser Part Number=581-TPSD157K016S0125, Arrow Part Number=TPSD157K016S0125, Arrow Price/Stock=https://www.arrow.com/en/products/tajd157k016rnjv/avx, Datasheet Link=http://datasheets.avx.com/TAJ.pdf, Height=3.1mm, Manufacturer_Part_Number=TPSD157K016S0125, Mouser Price/Stock=https://www.mouser.co.uk/ProductDetail/AVX/TAJD157K016RNJV?qs=%252BZP6%2F%252BtExtCxiQ2tCar1OQ%3D%3D, Supplier 1=Mouser, Supplier Part Number 1=581-TPSD157K016S0125
C15: library part CMP-001-00079-4, "Chip Capacitor, 10µF +/-20%, 25V, 0805, Thickness 1.45 mm", Case/Package=0805, Max Operating Temperature=85°C, Min Operating Temperature=-55°C, Tolerance=10%, Voltage Rating=25V, Mounting Technology=SMT, Pins=2
CN1: library part CMP-00257-52963780-1, "503480-0540 Connector FFC/FPC SKT 5 Position 0.5mm Solder Right Angle Surface Mount T/R", Current Rating=500mA, Flammability Rating="UL94 V-0", Manufacturer Lifecycle Status=ACTIVE, Max Operating Temperature=85°C, Min Operating Temperature=-40°C, Voltage Rating=50V, Actuator Material="Glass, Nylon, Polyamide", Contact Material="Bronze, Gold, Nickel", Contact Plating=Gold, Country of Origin=KR, Halogen Free="Low Halogen", Height=2.07mm, Housing Material=Polymer, Lifecycle Status=Production, Mount="Surface Mount", NexarPartId=52963780, Number of Circuits=5, Number of Contacts=5, Number of Positions=5, Number of Rows=1, Orientation="Right Angle", Pitch=508µm, Plating=Gold, RoHS=Compliant, Termination=Solder, Wire/Cable Type=Straight
CN2: library part CMP-17439-000553-2, "CONN HEADER SMD R/A 5POS 0.8MM", Case/Package=SMD/SMT, Current Rating=500mA, Max Operating Temperature=85°C, Min Operating Temperature=-25°C, Voltage Rating=30V, Contact Material="Copper, Tin", Height=1.75mm, Lead Free="Lead Free", Length=6.2mm, Number of Contacts=5, Number of Poles=5, Number of Rows=1, Pitch=800µm, RoHS=Compliant, Width=2.7mm
CN3: library part 105017-0001, "Micro USB Connector", Manufacturer_Name=Molex, Mouser Part Number=538-105017-0001, Manufacturer_Part_Number=105017-0001, Supplier 1=Mouser, Supplier 2=Digikey, Supplier Part Number 1=538-105017-0001, Supplier Part Number 2=WM1399CT-ND
CN4: library part BM20B(0.8)-40DS-0.4V(51), "Connector", Manufacturer_Name=Hirose, Mouser Part Number=798-BM20B0840DS04V51, Datasheet Link=https://datasheet.datasheetarchive.com/originals/distributors/Datasheets-DGA17/1065509.pdf, Height=0.9mm, Manufacturer_Part_Number=BM20B(0.8)-40DS-0.4V(51), Mouser Price/Stock=https://www.mouser.co.uk/ProductDetail/Hirose-Connector/BM20B0.8-40DS-0.4V51?qs=AAveGqk956F9p8KJryTUVg%3D%3D, Supplier 1=Mouser, Supplier Part Number 1=798-BM20B0840DS04V51, System=Connector
D1: "Diode", Manufacturer_Name=onsemi, Mouser Part Number=863-1SS400T1G, Arrow Part Number=1SS400T1G, Arrow Price/Stock=https://www.arrow.com/en/products/1ss400t1g/on-semiconductor?region=nac, Datasheet Link=http://www.onsemi.com/pub/Collateral/1SS400T1-D.PDF, Height=0.7mm, Manufacturer_Part_Number=1SS400T1G, Mouser Price/Stock=https://www.mouser.co.uk/ProductDetail/onsemi/1SS400T1G?qs=vLkC5FC1VN8%2F6DEK%2F5shrw%3D%3D, Supplier 1=Mouser, Supplier Part Number 1=863-1SS400T1G
D2: "Integrated Circuit", Manufacturer_Name="Texas Instruments", Mouser Part Number=595-TPD2E009DRTR, Arrow Part Number=TPD2E009DRTR, Arrow Price/Stock=https://www.arrow.com/en/products/tpd2e009drtr/texas-instruments?region=nac, Datasheet Link=https://www.ti.com/lit/ds/symlink/tpd2e009.pdf?ts=1621336941637&ref_url=https%253A%252F%252Fwww.google.com%252F, Height=0.5mm, Manufacturer_Part_Number=TPD2E009DRTR, Mouser Price/Stock=https://www.mouser.co.uk/ProductDetail/Texas-Instruments/TPD2E009DRTR?qs=XGzIaZb%2FFYLhG8oL%2FM05Rg%3D%3D, Supplier 1=Mouser, Supplier Part Number 1=595-TPD2E009DRTR
D3: "ESD DIODE-BI_LCSC#C314256"
FB1: library part CMP-07252-000001-1, "FERRITE BEAD 30 OHM 0805 1LN", Impedance At Frequency="30Ω @ 100MHz", Manufacturer=Bourns, Manufacturer Part Number=MH2029-300Y, Package=MH2029, Rms Current=3A, Series Resistance=25mΩ, Temperature="-55°C to +125°C", Temperature Range High=+125°C, Temperature Range Low=-55°C, Tolerance=25%, Automotive=No, Category=FBead, ComponentLink2Description=Datasheet, ComponentLink2URL=https://www.bourns.com/docs/Product-Datasheets/mh.pdf, Core Material=Ferrite, Device Class L1="Passive Components", Device Class L2="EMI / RFI Components", Device Class L3="Ferrite Beads and Chips", Digikey Description="FERRITE BEAD 30 OHM 0805 1LN", Height=1.1mm, Ipc Land Pattern Name=CAPC200120X90, Lead Free=Yes, Mouser Description="Ferrite Beads 30 ohms 25% HIGH CURRENT", Octopart=https://octopart.com/mh2029-300y-bourns-756929, Resistance=30Ω, RoHS=TRUE
LED1: library part CMP-35283-000001-2, "LED GREEN CLEAR 0402 SMD SUPPLIMENT LCSC MHT136CGCT", Case Code (Imperial)=0402, Case Code (Metric)=1005, Color=Green, Forward Voltage=1.9V, Lens Color=Colorless, Test Current=20mA, Case/Package=0402, Dominant Wavelength=572nm, Height=0.71mm, Length=1mm, Lens Size=1mm, Lens Style=Flat, Lens Transparency=Clear, Luminous Intensity=28.5mcd, Mount="Surface Mount", Packaging="Tape and Reel", Viewing Angle=130°, Width=0.5mm
LED2: library part CMP-35283-000003-1, "LED RED CLEAR 0402 SMD SUPPLIMENT LCSC MHT136CRCT", Case Code (Imperial)=0402, Case Code (Metric)=1005, Color=Red, Forward Voltage=2.1V, Lens Color=Colorless, Test Current=20mA, Case/Package=0402, Dominant Wavelength=631nm, Height=0.71mm, Length=1mm, Lens Size=1mm, Lens Style=Flat, Lens Transparency=Clear, Luminous Intensity=90mcd, Mount="Surface Mount", Packaging="Tape and Reel", Viewing Angle=130°, Width=0.5mm
LED3: library part BZ-C0603-K4-E1, MPN=BZ-C0603-K4-E1
LED4: library part CMP-2100-03578-1, "Chip LED, Red, 5 V, 25 mA, -40 to 85 degC, 2-Pin SMD (0603), RoHS, Tape and Reel", Case/Package=0603, Color=Red, Forward Current=25mA, Forward Voltage=2.2V, Manufacturer="Everlight Electronics", Manufacturer Part Number=19-217/R6C-AL1M2VY/3T, Max Operating Temperature=85°C, Min Operating Temperature=-40°C, Package Description="2-Pin Surface Mount Device, Body 1.6 x 0.8 mm", Supplier Part Number=1080-1585-6-ND, Category=LEDs, Channels=1, Colour=Red, ComponentLink1Description=https://datasheet.ciiva.com:443/pdfs/VipMasterIC/IC/EVER/EVER-S-A0007433843/EVER-S-A0007433843-1.pdf?src-supplier=IHS+Markit, ComponentLink1URL=https://datasheet.ciiva.com:443/pdfs/VipMasterIC/IC/EVER/EVER-S-A0007433843/EVER-S-A0007433843-1.pdf?src-supplier=IHS+Markit, ComponentLink2Description=https://media.digikey.com/pdf/Data%20Sheets/Everlight%20PDFs/19-217-R6C-AL1M2VY-3T.pdf?src-supplier=Digikey, ComponentLink2URL=https://media.digikey.com/pdf/Data%20Sheets/Everlight%20PDFs/19-217-R6C-AL1M2VY-3T.pdf?src-supplier=Digikey, Datasheet URL=https://datasheet.ciiva.com/4688/el-19-217-r6c-al1m2vy-3tpdf-187026-4688713.pdf, Datasheet Version="Rev. 1, 01/2005", Lead Free=LeadFree, Lens Style=Clear, Luminous Intensity-Nom=20mcd, Manufacturer URL=http://www.everlight.com/, Mounting Technology="Surface Mount", Optoelectronic Device Type="SINGLE COLOR LED", Overall Height=0.4mm, Package Reference=0603, Packaging="Tape and Reel", Pins=2, Reach SVHC Compliant=Yes, RoHS=Yes, RoHS Compliant=Yes, RoHSCompliant=false, Shape=Rectangular, Size=1mm, Supplier=Digikey, Terminal Pitch=1.5mm, Viewing Angle=120°
R1 R10: library part CMP-009-00138-3, "Chip Resistor, 1 MOhms, +/-5 %, 63 mW, -55 to 155 degC, 0402", Case/Package=0402, Max Operating Temperature=155°C, Min Operating Temperature=-55°C, Power=63mW, Tolerance=5%, Pins=2
R2 R3: library part CMP-009-00138-3, "Chip Resistor, 22 Ohms, +/-5 %, 63 mW, -55 to 155 degC, 0402", Case/Package=0402, Max Operating Temperature=155°C, Min Operating Temperature=-55°C, Power=63mW, Tolerance=5%, Pins=2
R4 R7: library part CMP-009-00138-3, "Chip Resistor, 10 kOhms, +/-5 %, 63 mW, -55 to 155 degC, 0402", Case/Package=0402, Max Operating Temperature=155°C, Min Operating Temperature=-55°C, Power=63mW, Tolerance=5%, Pins=2
R5 R6 R11 R12: library part CMP-009-00138-3, "Chip Resistor, 1 kOhms, +/-5 %, 63 mW, -55 to 155 degC, 0402", Case/Package=0402, Max Operating Temperature=155°C, Min Operating Temperature=-55°C, Power=63mW, Tolerance=5%, Pins=2
R8: library part CMP-009-00138-3, "Chip Resistor, 100 kOhms, +/-5 %, 63 mW, -55 to 155 degC, 0402", Case/Package=0402, Max Operating Temperature=155°C, Min Operating Temperature=-55°C, Power=63mW, Tolerance=5%, Pins=2
R9: library part CMP-009-00138-3, "Chip Resistor, 49.9 kOhms, +/-5 %, 63 mW, -55 to 155 degC, 0402", Case/Package=0402, Max Operating Temperature=155°C, Min Operating Temperature=-55°C, Power=63mW, Tolerance=5%, Pins=2
SW1 SW5 SW6 SW9: library part CNDV_SW, "Conductive Pad Switch"
SW2: library part CMP-2100-03586-2, "LCSC SWITCH TACTILE SPST-NO 0.05A 12V", Contact Current Rating=50mA, Contact Resistance=100mR, Insulation Resistance=100MR, Max Operating Temperature=70°C, Max Voltage Rating (DC)=12V, Min Operating Temperature=-25°C, Operating Force=1.5N, Package Quantity=1, Ratings="Dust Proof", Actuator Length=0.4mm, Actuator Type=Standard, Contact Material=Silver, Current Rating=50mA, Depth=2.5mm, Electrical Life=200000Cycles, Height=1.2mm, Illumination Type=Non-Illuminated, Lead Free="Lead Free", Length=4mm, Max Current Rating=50mA, Mechanical Life=200000Cycles, Mount="Surface Mount", Orientation=Straight, Packaging="Tape and Reel", Switch Function=Off-Mom, Switch Travel=0.15mm, Termination=SMD/SMT, Throw Configuration=SPST, Voltage Rating (DC)=12V, Weight=0.000776oz, Width=3mm
SW3: library part APTCLGTVTR, "Switch", Manufacturer_Name=Apem, Mouser Part Number=642-APTCLGTVTR, Datasheet Link=https://media.digikey.com/pdf/Data%20Sheets/APEM%20Components%20PDFs/APTCLGTV.pdf, Height=1.87mm, Manufacturer_Part_Number=APTCLGTVTR, Mouser Price/Stock=https://www.mouser.co.uk/ProductDetail/Apem/APTCLGTVTR?qs=ikKlZSMjbcRNf%252Bwzp31ctg%3D%3D
SW4 SW7: library part EVQ-Q2B03W, "Switch", Manufacturer_Name=Panasonic, Mouser Part Number=667-EVQ-Q2B03W, Arrow Part Number=EVQ-Q2B03W, Arrow Price/Stock=https://www.arrow.com/en/products/evq-q2b03w/panasonic, Datasheet Link=https://industrial.panasonic.com/cdbs/www-data/pdf/ATK0000/ATK0000C360.pdf, Manufacturer_Part_Number=EVQ-Q2B03W, Mouser Price/Stock=https://www.mouser.co.uk/ProductDetail/Panasonic/EVQ-Q2B03W?qs=WwqriLBepZtuDDVMSV2X%252BA%3D%3D, Supplier 1=Mouser, Supplier Part Number 1=667-EVQ-Q2B03W
SW8: library part APTCLGTVTR_NH, "Switch", Manufacturer_Name=Apem, Manufacturer_Part_Number=APTCLGTVTR, Mouser Part Number=642-APTCLGTVTR, Datasheet Link=https://media.digikey.com/pdf/Data%20Sheets/APEM%20Components%20PDFs/APTCLGTV.pdf, Height=1.87mm, Mouser Price/Stock=https://www.mouser.co.uk/ProductDetail/Apem/APTCLGTVTR?qs=ikKlZSMjbcRNf%252Bwzp31ctg%3D%3D, Supplier 1=Mouser, Supplier Part Number 1=642-APTCLGTVTR
TP1 TP2 TP3: library part TestPoint, "TestPoint"
U1: library part CMP-0095-00285-2, "8-bit AVR Microcontroller, 2.7-5.5V, 16MHz, 32KB Flash, 1KB EEPROM, 2.5KB SRAM, USB Controller, 44-pin TQFP, Industrial Grade (-40°C to 85°C), Ext Osc", ComponentLink1Description="Manufacturer URL", ComponentLink1URL=http://www.atmel.com/, ComponentLink2Description="ATmega16U4/32U4 Datasheet", ComponentLink2URL=http://www.atmel.com/dyn/resources/prod_documents/doc7766.pdf, ComponentLink3Description="ATmega16U4 ATmega32U4 Summary", ComponentLink3URL=http://www.atmel.com/dyn/resources/prod_documents/7766S.pdf, DatasheetVersion="revF, Nov-2010", PackageDescription="44-Pin Plastic Thin Quad Flat Pack, 10 x 10 x 1.0 mm Body, 0.8 mm Pitch (TQFP)", PackageReference=44ML, PackageVersion="rev.G, Jul-2007", RevisionNote="DatasheetVersion updated. URLs added."
U2: "Integrated Circuit", Manufacturer_Name="Diodes Incorporated", Mouser Part Number=621-AP22652FDZ-7, Arrow Part Number=AP22652FDZ-7, Arrow Price/Stock=https://www.arrow.com/en/products/ap22652fdz-7/diodes-incorporated?region=nac, Datasheet Link=https://www.diodes.com//assets/Datasheets/AP22652_53_52A_53A.pdf, Height=0.8mm, Manufacturer_Part_Number=AP22652FDZ-7, Mouser Price/Stock=https://www.mouser.co.uk/ProductDetail/Diodes-Incorporated/AP22652FDZ-7?qs=rkhjVJ6%2F3EKN8%2FqxLFOecw%3D%3D, Supplier 1=Mouser, Supplier Part Number 1=621-AP22652FDZ-7
U3: "Integrated Circuit", Manufacturer_Name=Nexperia, Mouser Part Number=771-74LVC1G07GX4Z, Arrow Part Number=74LVC1G07GX4Z, Arrow Price/Stock=https://www.arrow.com/en/products/74lvc1g07gx4z/nexperia?region=nac, Datasheet Link=https://assets.nexperia.com/documents/data-sheet/74LVC1G07.pdf, Height=0.35mm, Manufacturer_Part_Number=74LVC1G07GX4Z, Mouser Price/Stock=https://www.mouser.co.uk/ProductDetail/Nexperia/74LVC1G07GX4Z?qs=u16ybLDytRaaOC9%252BoslzEg%3D%3D, Supplier 1=Mouser, Supplier Part Number 1=771-74LVC1G07GX4Z
X1: library part CMP-27762-015167-1, "Crystal 16MHz ±30ppm (Tol) ±30ppm (Stability) 10pF FUND 80Ω 4-Pin SMD T/R", Case/Package=CSMD, ESR (Equivalent Series Resistance)=80R, Frequency Stability=30ppm, Load Capacitance=10pF, Max Operating Temperature=70°C, Min Operating Temperature=-20°C, Operating Frequency="16 MHz", Package Quantity=1000, Depth=2.5mm, Frequency=16MHz, Frequency Tolerance=30ppm, Height=1mm, Lead Free="Lead Free", Length=3.2mm, Mount="Surface Mount", Number of Pins=4, Packaging="Tape and Reel", Series=ABM8G, Termination=SMD/SMT, Tolerance=30ppm, Width=2.5mm

## Free pads (board coordinates)
  round 3 hole 2.032 paste-2539.97: 3(57.44,57.5) 3(62.691,106.248) 3(86.94,35.776) 3(86.94,106.818)

## Via types
v1: diameter 0.45, hole 0.2, Top Layer to Bottom Layer, tented both sides, 248 vias
v2: diameter 0.45, hole 0.2, Top Layer to Bottom Layer, 2 vias

## Nets (pads, with @x,y where several pads share a name; then routed paths per layer and width w, separated by ;. In a path a pad name is that pad's centre, name@x,y a point inside that pad or via, vN(x,y) a via of type N, cw(c..) or ccw(c..) an arc to the next point about the centre after c; other vN are vias at no path point)
+3V3: C1.1 CN1.1 CN4.2 CN4.4 LED3.1 LED4.1 R7.2 R8.1 TP3.1 U3.4 | length 29.4
  Top Layer w0.15: R7.2@85.05,42.8 R8.1@85.05,44 v1(85.05,44.8)
  Top Layer w0.17: CN4.4@83.404,54.878 CN4.2@83.404,55.278 ; U3.4@87.035,103.585 v1@87.035,104.515
  Top Layer w0.22: v1(87.025,104.525) v1@87.035,104.515
  Bottom Layer w0.17: v1(81.45,55.575) 81.45,41.05 81.944,40.556 84.441,40.556 85.05,41.165 v1(85.05,44.8) ; v1(87.025,104.525) 87.025,103.735 87.76,103 LED4.1@88.75,103 LED3.1@88.75,101.95
  other v1: 82.15,55.575 81.45,56.275 82.15,56.275 57.1,85.2 57.8,85.2 57.1,85.9 57.8,85.9
+5V: C2.1 C3.1 C4.1 C14.1 C15.1 CN4.1 CN4.3 CN4.5 CN4.7 CN4.MP1 CN4.MP2 D1.1 FB1.2 LED1.1 LED2.1 R4.1 TP1.1 U1.2 U1.7 U1.14 U1.34 U2.6 | length 41.5
  Top Layer w0.17: 84.5,54.175 84.597,54.078 CN4.7@85.584,54.078 86.853,54.078 87.1,54.325
  Top Layer w0.175: C4.1@81.455,86.1 81.43,86.075 81.43,85.67 82.1,85 82.1,81.35 R4.1@82,81.25
  Top Layer w0.3: LED1.1@56,92.62 LED2.1@56,90.791 56.005,90.795 60.316,90.795 61.586,92.065 65.071,92.065 65.506,92.5 U1.34@68.175,92.5 ; CN4.MP2@83.569,56.488 84.887,56.488 84.925,56.45
  Top Layer w0.35: C14.1@57.91,46.2 57.93,46.2 58.025,46.105 58.025,45.575 58.1,45.5 U2.6@58.1,45.1
  Top Layer w0.54: U1.34@68.175,92.5 v1(69.703,92.499) v1(69.703,92.499) ; U1.34@68.45,92.528 C2.1@68.45,93.7 ; v1(69.275,80.925) 70.675,80.925 C3.1@70.675,80.94 ; C3.1@70.65,81.11 70.675,81.135 U1.2@70.675,82.8 ; v1(74.675,84.425) 75.35,85.1 v1(76.9,85.1) 77.1,85.1 v1(78.1,86.1) U1.14@79.575,86.1 80.778,86.1 80.779,86.101 C4.1@81.264,86.101 ; C4.1@81.399,86.102 v1(81.4,86.826) v1(81.4,86.826)
  Top Layer w0.6: C2.1@68.45,93.7 68.46,93.71 v1(68.46,94.556) ; U1.7@74.675,82.8 v1(74.675,84.425)
  other v1: 56.1,46.3 56.8,46.3 56.1,47 56.8,47 56.1,47.7 56.8,47.7 84.8,54.5 84.8,55.2 86.3,55.2 87,55.2 84.8,55.9 85.5,55.9 86.3,55.9 87,55.9 86.3,56.6 87,56.6 69.95,80.925 78.648,99.2 79.348,99.2 78.648,99.9 79.348,99.9
A: SW1.1 U1.21 | length 13
  Top Layer w0.17: v1(74.4,86.9) 76,86.9 77.3,88.2 77.3,90.388 78.53,91.618 79.493,91.618 U1.21@79.575,91.7
  Bottom Layer w0.15: 72.97,90.597 73.453,90.597 74.4,89.65 v1(74.4,86.9)
ACT: CN4.23 R11.1 | length 54.5
  Top Layer w0.17: v1(84.6,51.45) 85.172,50.878 CN4.23@85.584,50.878 ; R11.1@86.925,101.375 86.95,101.35 86.95,98.875 v1(86.975,98.85)
  Bottom Layer w0.17: v1(84.6,51.45) 86.05,52.9 87.9,52.9 88.5,53.5 88.5,97.325 v1(86.975,98.85)
AREF: C7.1 U1.42 | length 1.9
  Top Layer w0.54: C7.1@66.325,86.1 U1.42@68.175,86.1
ATGND: C7.2 NT1.1 | length 0.9
  Top Layer w0.7: NT1.1@64.35,86.05 64.4,86.1 C7.2@65.245,86.1